# Allegro board AVRUSB500_1.brd
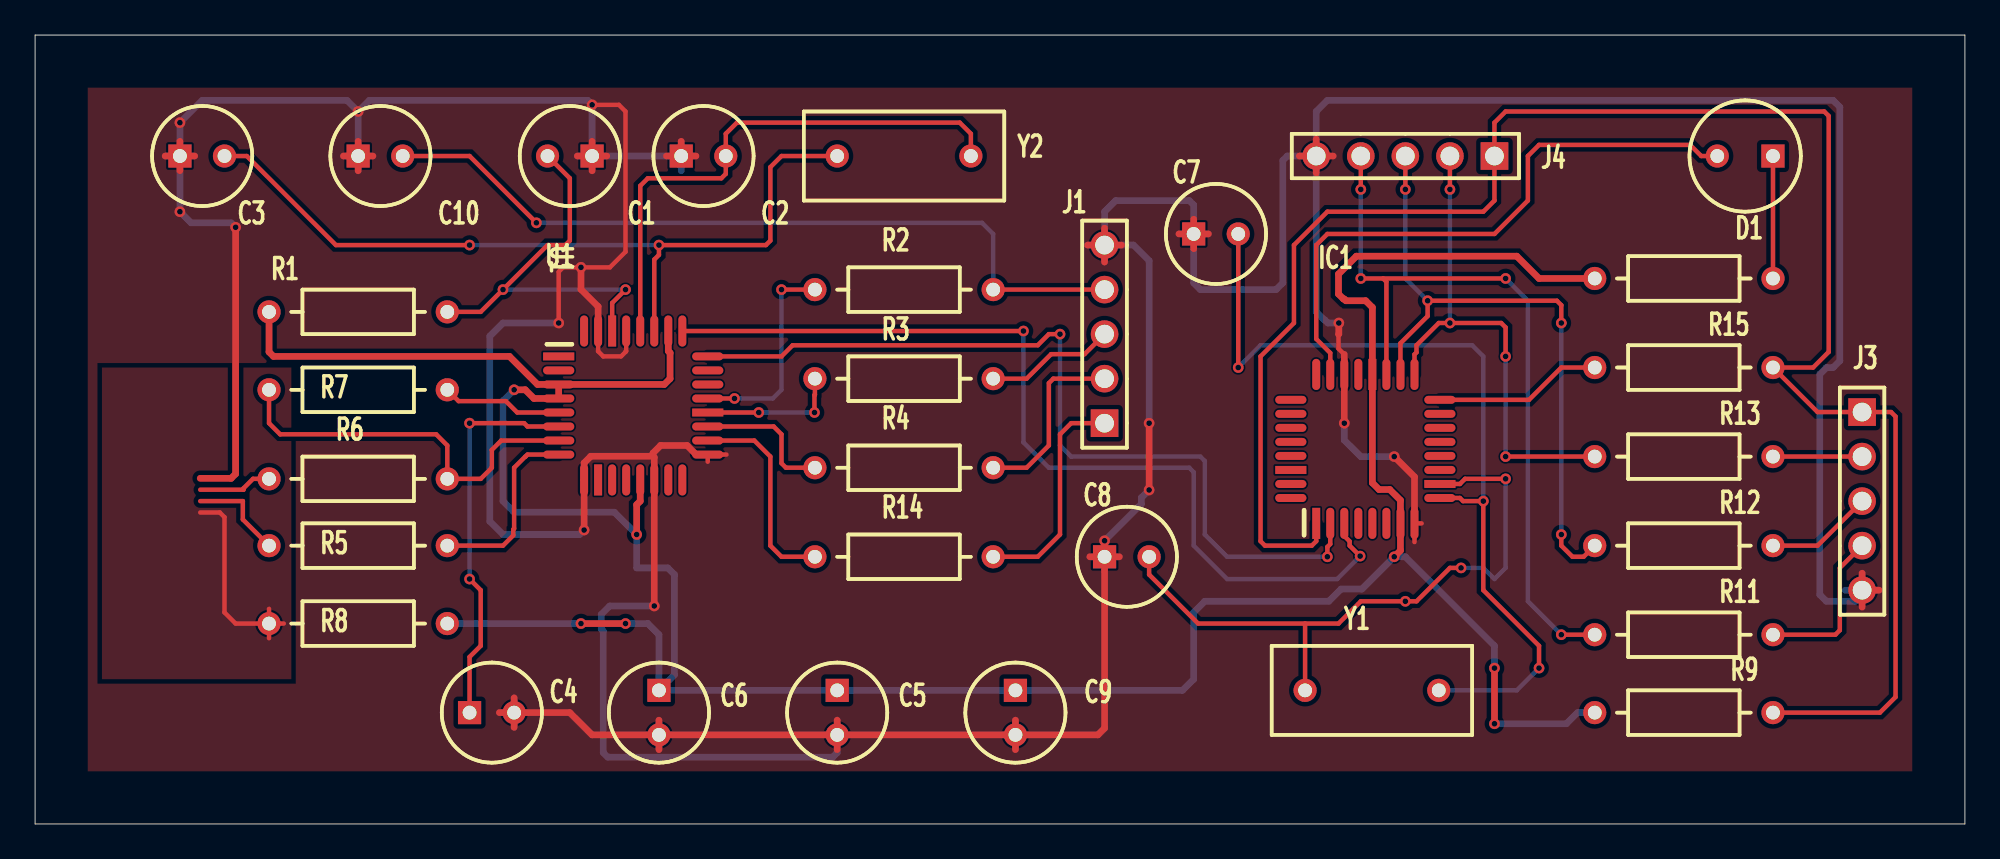
[diagram p0: board, top side]
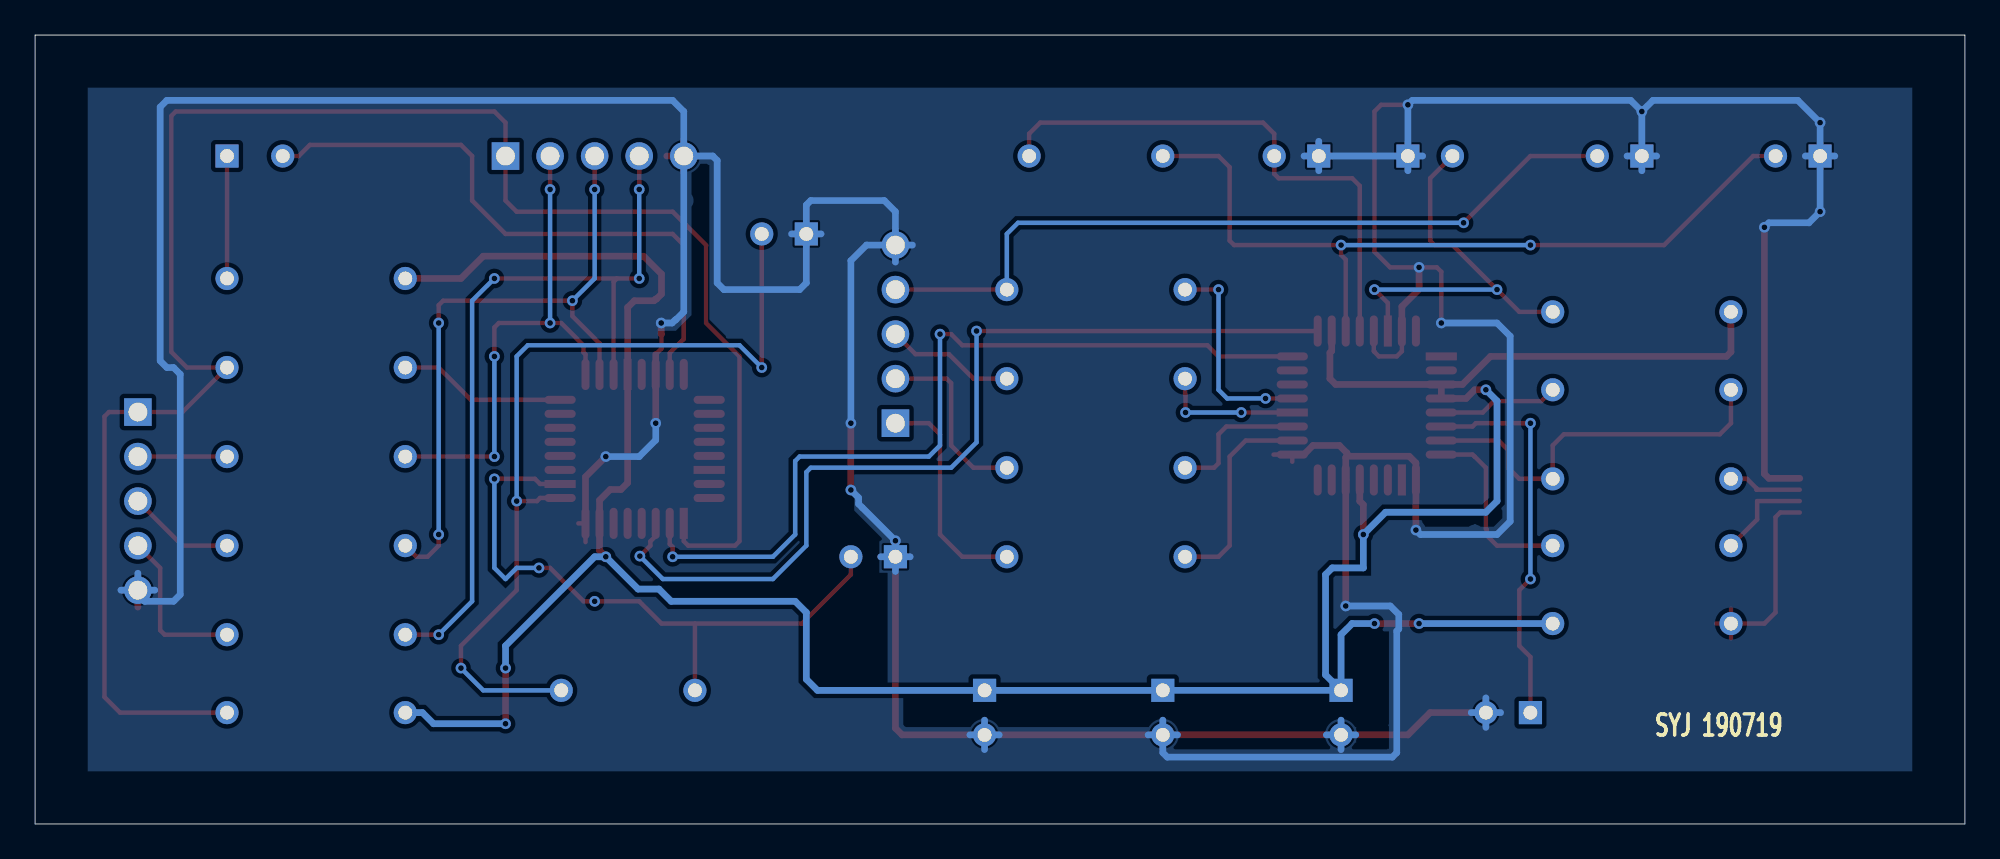
[diagram p1: board, bottom side, seen from below]

Outline 110 x 45 mm; copper layers: TOP, BOTTOM. Coordinates in mm from the lower left corner of the outline.
Outline path: 0,45 110,45 110,0 0,0 0,45

## Design rules (mm)
constraint set DEFAULT: min track width 0.254
net group POWERNETS: nets VCC

## Placement (name value [footprint] x y rotation side)
C1  47nF  [CPCYL1D225LS100031]  31.75 38.1 180 top
C2  27pF  [CPCYL1D225LS100031]  36.83 38.1 0 top
C3  27pF  [CPCYL1D225LS100031]  8.25 38.1 0 top
C4  47nF  [CPCYL1D225LS100031]  24.77 6.35 0 top
C5  100nF  [CPCYL1D225LS100031]  45.72 7.62 270 top
C6  1uF  [CPCYL1D225LS100031]  35.56 7.62 270 top
C7  100nF  [CPCYL1D225LS100031]  66.04 33.66 0 top
C8  100nF  [CPCYL1D225LS100031]  60.96 15.24 0 top
C9  100nF  [CPCYL1D225LS100031]  55.88 7.62 270 top
C10  22nF  [CPCYL1D225LS100031]  18.42 38.1 0 top
D1  LED  [CYLD250LS125031]  99.06 38.1 180 top
IC1  ATmega8  [QUAD80M32WG900]  73.03 17.15 0 top
J1  bbpg_Bitbang  [BLKCON100VHTM1SQSW1005]  60.96 22.86 90 top
J3  avrusb500_out  [BLKCON100VHTM1SQSW1005]  104.14 23.5 270 top
J4  firmware_in  [BLKCON100VHTM1SQSW1005]  83.19 38.1 180 top
NOREF  -  []  0 45 0 top
NOREF#2  -  []  0 0 90 top
R1  470  [AX400X100031]  23.5 29.21 180 top
R2  220  [AX400X100031]  44.45 30.48 0 top
R3  220  [AX400X100031]  44.45 25.4 0 top
R4  220  [AX400X100031]  44.45 20.32 0 top
R5  27  [AX400X100031]  13.34 15.88 0 top
R6  27  [AX400X100031]  13.34 19.69 0 top
R7  1.5k  [AX400X100031]  13.34 24.77 0 top
R8  2.2  [AX400X100031]  13.34 11.43 0 top
R9  10k  [AX400X100031]  88.9 6.35 0 top
R10  470  [AX400X100031]  99.06 31.12 180 top
R11  1k  [AX400X100031]  88.9 10.8 0 top
R12  220  [AX400X100031]  88.9 15.88 0 top
R13  1k  [AX400X100031]  88.9 20.96 0 top
R14  220  [AX400X100031]  44.45 15.24 0 top
R15  220  [AX400X100031]  88.9 26.04 0 top
U1  FT232BM  [QUAD80M32WG900]  29.85 26.67 270 top
Y1  3.6864Mhz  [RAD450X200LS300031]  72.39 7.62 0 top
Y2  6Mhz  [RAD450X200LS300031]  53.34 38.1 180 top

## Library data of the parts
C1-C5 C7-C10 = CAPACITOR NON-POL: alternate symbols: (SMDCAP)
C6 = CAPACITOR POL: alternate symbols: (SMDCAP)
D1 = LED
IC1 = ATmega8-DIL28_1
J1 J3 J4 = CON5
R1-R15 = R: alternate symbols: (SMDRES)
U1 = FT232BM_2
Y1 Y2 = ZTA

## Footprints (pads in the part's own frame, mm; a bottom-side part is the same pattern mirrored in y, then rotated)
AX400X100031
  round 1.321 hole 0.787: 1(0,0) 2(10.16,0)
BLKCON100VHTM1SQSW1005
  rect 1.575x1.575 hole 1.067: 1(0,0)
  round 1.575 hole 1.067: 2(2.54,0) 3(5.08,0) 4(7.62,0) 5(10.16,0)
CPCYL1D225LS100031
  rect 1.321x1.321 hole 0.787: 1(0,0)
  round 1.321 hole 0.787: 2(2.54,0)
CYLD250LS125031
  rect 1.321x1.321 hole 0.787: 1(0,0)
  round 1.321 hole 0.787: 2(3.175,0)
QUAD80M32WG900
  rect 0.457x1.778 smd: 1(0,0) 20(3.2,8.496)
  oval 0.457x1.778 smd: 2(0.8,0) 3(1.6,0) 4(2.4,0) 5(3.2,0) 6(4,0) 7(4.801,0) 8(5.601,0) 17(5.601,8.496) 18(4.801,8.496) 19(4,8.496) 21(2.4,8.496) 22(1.6,8.496) 23(0.8,8.496) 24(0,8.496)
  oval 1.778x0.457 smd: 9(7.048,1.448) 11(7.048,3.048) 12(7.048,3.848) 13(7.048,4.648) 14(7.048,5.448) 15(7.048,6.248) 16(7.048,7.048) 25(-1.448,7.048) 26(-1.448,6.248) 27(-1.448,5.448) 28(-1.448,4.648) 29(-1.448,3.848) 31(-1.448,2.248) 32(-1.448,1.448)
  rect 1.778x0.457 smd: 10(7.048,2.248) 30(-1.448,3.048)
RAD450X200LS300031
  round 1.321 hole 0.787: 1(0,0) 2(7.62,0)

## Nets
+5V: R8.1
GND: C1.1 C2.1 C3.1 C4.2 C5.2 C6.2 C7.1 C8.1 C9.2 C10.1 IC1.8 IC1.22 J1.5 J3.5 J4.5 U1.9 U1.14 U1.17 U1.29 U1.31
VCC: C5.1 C6.1 C9.1 IC1.7(VCC) IC1.20 R1.2 R8.2 R9.1 R10.2 U1.3 U1.4 U1.13 U1.26
BMISO: J1.3 R3.2
BMOSI: J1.2 R4.2
BRESET: J1.1 R14.2
BSCK: C10.2 J1.4 R2.2
D+: R6.1
D-: R5.1
F_MISO: IC1.18 J4.3 R12.1
F_MOSI: IC1.17 J4.2 R13.1
F_SCK: IC1.19 J4.4 R11.1
MISO: J3.3 R12.2
MOSI: J3.2 R13.2
RESET: IC1.1 J3.1 J4.1 R9.2 R15.2
RXD: IC1.2 U1.24
SCK: J3.4 R11.2
TXD: IC1.3 U1.25
N02483: R6.2 R7.1 U1.7
N02615: R5.2 U1.8
N03527: C4.1 U1.6
N06839: R2.1 U1.21
N06967: R3.1 U1.20
N07033: R4.1 U1.19
N07247: R14.1 U1.18
N11951: R7.2 U1.5
N15182: C7.2 IC1.9 Y1.2
N15289: C8.2 IC1.10 Y1.1
N19734: D1.2(CATHODE) IC1.23
N20572: D1.1 R10.1
N22544: IC1.16 R15.1
N41098: C3.2 U1.27 Y2.2
N41106: C2.2 U1.28(XTOUT) Y2.1
N49165: C1.2 R1.1 U1.30

Pads without a net: IC1 4 5 6 11 12 13 14 15 21 24 25 26 27 28 29 30 31 32; U1 1 2 10 11 12 15 16 22 23 32

## Via types
v1: diameter 0.61, hole 0.33, TOP to BOTTOM, 55 vias

## Routing (per net, layer and track width the routed paths; a pad name or vN(x,y) marks a point on that pad's centre or on a via; arc(x,y) is an arc through that point)
+5V: length 12.2
  TOP w0.254: 9.42,17.77 10.53,17.77 10.8,17.5 10.8,12.07 11.43,11.43 R8.1 ; R8.1 13.34,12.27 ; R8.1 14.17,11.43 ; R8.1 13.34,10.59
GND: length 401.7
  TOP w0.254: v1(31.75,41.02) 33.27,41.02 33.66,40.64 33.66,32.64 32.77,31.75 v1(31.12,31.75) 30.1,31.75 29.85,31.5 v1(29.85,28.58) ; 79.03,17.15 IC1.8 78.63,16.08 ; 39.41,21.07 U1.17 38.34,20.66 ; 74.3,27.94 74.3,27.11 74.62,26.78 ; U1.31 32.09,26.96 32.38,26.67 33.4,26.67 33.66,26.92 33.66,26.94 33.69,26.98 U1.29
  TOP w0.381: 74.3,27.94 74.31,27.95 v1(74.31,28.58) ; C5.2 C9.2 ; C5.2 45.72,4.24 ; C5.2 45.72,5.92 ; C5.2 C6.2 ; C9.2 55.88,5.92 ; C9.2 60.58,5.08 60.96,5.46 C8.1 ; C9.2 55.88,4.24 ; 35.56,4.24 C6.2 ; C6.2 35.56,5.92 ; C6.2 31.75,5.08 30.48,6.35 27.31,6.35 ; 59.99,33.02 J1.5 ; J1.5 60.96,33.99 ; J1.5 61.93,33.02 ; J1.5 60.96,32.05 ; C1.1 31.75,38.94 ; C1.1 32.59,38.1 ; C1.1 30.91,38.1 ; C1.1 31.75,37.26 ; 27.31,6.35 26.47,6.35 ; 27.31,6.35 27.31,7.19 ; 27.31,6.35 27.31,5.51 ; C2.1 37.67,38.1 ; C2.1 35.99,38.1 ; C2.1 36.83,38.94 ; C3.1 8.25,38.94 ; C3.1 7.42,38.1 ; C3.1 9.09,38.1 ; C3.1 8.25,37.26 ; 66.04,32.82 C7.1 ; C7.1 65.2,33.66 ; C7.1 66.04,34.49 ; C7.1 66.88,33.66 ; 60.12,15.24 C8.1 ; C8.1 60.96,16.08 ; C8.1 61.8,15.24 ; C10.1 19.25,38.1 ; C10.1 18.42,38.94 ; C10.1 17.58,38.1 ; C10.1 18.42,37.26 ; 73.03,37.13 J4.5 ; J4.5 73.99,38.1 ; J4.5 73.03,39.07 ; J4.5 72.06,38.1 ; v1(63.5,22.86) v1(63.5,19.05) ; J3.5 104.14,14.3 ; J3.5 105.11,13.34 ; J3.5 104.14,12.37
  TOP w0.382: U1.17 37.68,21.07 37.16,21.59 35.65,21.59 35.22,21.16 35.22,20.97 ; U1.31 32.09,29.51 31.12,30.49 v1(31.12,31.75) ; v1(11.43,34.04) 11.43,19.97 11.18,19.72 9.42,19.72 ; v1(77.47,20.96) 78.63,19.8 IC1.8 ; v1(35.29,12.43) U1.14 35.29,20.9 35.22,20.97 ; 35.22,20.97 31.68,20.97 31.29,20.59 U1.9 v1(31.29,16.76) ; 74.62,26.78 v1(74.62,22.86)
  BOTTOM w0.381: 66.88,33.66 C7.1 65.2,33.66 ; 36.83,37.26 C2.1 ; C2.1 36.83,38.94 ; C2.1 37.67,38.1 ; 44.88,5.08 C5.2 ; C5.2 46.56,5.08 ; C5.2 45.72,5.92 ; 9.09,38.1 C3.1 7.42,38.1 ; 60.12,15.24 C8.1 ; C8.1 61.8,15.24 ; C8.1 60.96,14.4 ; 103.17,13.34 J3.5 ; J3.5 104.14,14.3 ; J3.5 104.14,13.08 103.76,12.7 102.11,12.7 101.73,13.08 101.73,25.65 102.11,26.04 102.49,26.04 102.87,26.42 102.87,40.89 102.49,41.28 73.66,41.28 73.03,40.64 J4.5 ; J3.5 105.11,13.34 ; 62.87,18.06 63.06,18.25 63.06,18.61 v1(63.5,19.05) ; 27.31,6.35 28.14,6.35 ; 27.31,6.35 26.47,6.35 ; 27.31,6.35 27.31,5.51 ; 27.31,6.35 27.31,7.19 ; C10.1 19.25,38.1 ; C10.1 18.42,37.26 ; C10.1 17.58,38.1 ; 55.04,5.08 C9.2 ; C9.2 56.72,5.08 ; C9.2 55.88,5.92 ; C9.2 55.88,4.24 ; C6.2 35.56,5.92 ; C6.2 36.4,5.08 ; C6.2 34.72,5.08 ; C6.2 35.56,4.24 ; 31.75,37.26 C1.1 30.91,38.1 ; 60.96,32.05 J1.5 59.99,33.02
  BOTTOM w0.382: C5.2 45.72,4.06 45.47,3.81 32.64,3.81 32.38,4.06 32.38,11 32.27,11.12 32.27,11.95 32.75,12.43 v1(35.29,12.43) ; v1(18.42,40.64) 17.78,41.28 9.53,41.28 v1(8.25,40.01) C3.1 v1(8.25,34.93) 8.89,34.29 11.18,34.29 v1(11.43,34.04) ; v1(18.42,40.64) 19.05,41.28 31.5,41.28 v1(31.75,41.02) C1.1 C2.1 ; v1(18.42,40.64) C10.1 ; v1(63.5,22.86) 63.5,32.13 62.61,33.02 J1.5 60.96,34.93 61.6,35.56 65.79,35.56 66.04,35.31 C7.1 66.04,30.86 66.42,30.48 70.74,30.48 71.12,30.86 71.12,37.85 71.37,38.1 J4.5 73.03,29.21 73.48,28.75 73.51,28.75 73.69,28.58 v1(74.31,28.58) ; C8.1 v1(60.96,16.15) 62.87,18.06 ; v1(74.62,22.86) 74.62,21.9 75.56,20.96 v1(77.47,20.96) ; v1(31.29,16.76) 31.04,16.51 26.67,16.51 25.92,17.26 25.92,27.83 26.67,28.58 v1(29.85,28.58)
VCC: length 177.1
  TOP w0.381: v1(31.12,11.43) v1(33.66,11.43) ; v1(83.19,8.89) v1(83.19,5.72)
  TOP w0.382: 34.49,19.62 34.49,18.42 34.29,18.21 v1(34.29,16.51) ; U1.3 28.64,25.07 27.04,26.67 13.59,26.67 13.34,26.92 13.34,29.21 ; U1.3 35.87,25.07 36.19,25.4 36.19,26.87 36.09,26.98 U1.26 ; U1.3 U1.4 28.44,24.27 27.94,24.77 v1(27.31,24.77) ; R10.2 85.73,31.12 84.46,32.39 75.31,32.39 74.3,31.37 74.3,30.23 74.58,29.94 74.62,29.94 74.72,29.84 75.84,29.84 76.23,29.46 IC1.20 76.23,19.46 76.61,19.08 77.22,19.08 77.83,18.47 IC1.7 77.83,15.6 v1(77.47,15.24)
  BOTTOM w0.381: C5.1 C6.1 ; 34.93,11.43 34.93,11.43 v1(33.66,11.43)
  BOTTOM w0.382: 34.93,11.43 35.56,10.8 C6.1 36.45,8.51 36.45,14.22 36.06,14.61 34.29,14.61 v1(34.29,16.51) 33.02,17.78 27.31,17.78 26.67,18.42 26.67,24.13 v1(27.31,24.77) ; v1(83.19,8.89) 83.19,10.16 78.11,15.24 v1(77.47,15.24) 75.63,13.4 74.44,13.4 73.74,12.7 66.68,12.7 66.04,12.06 66.04,8.26 65.41,7.62 C9.1 C5.1 ; v1(31.12,11.43) R8.2 ; v1(83.19,5.72) 87.29,5.72 87.92,6.35 R9.1
BMISO: length 7.4
  TOP w0.254: R3.2 56.52,25.4 57.91,26.8 59.82,26.8 J1.3
BMOSI: length 10.5
  TOP w0.254: R4.2 56.52,20.32 57.79,21.59 57.79,25.15 58.04,25.4 J1.2
BRESET: length 12.9
  TOP w0.254: J1.1 59.06,22.86 58.42,22.23 58.42,16.51 57.15,15.24 R14.2
BSCK: length 45
  TOP w0.254: R2.2 J1.4 ; v1(28.58,34.29) 24.77,38.1 C10.2
  BOTTOM w0.254: v1(28.58,34.29) 53.98,34.29 54.61,33.66 R2.2
D+: length 4.2
  TOP w0.254: 9.42,19.07 11.88,19.07 11.88,19.14 12.42,19.69 R6.1
D-: length 5.6
  TOP w0.254: 9.42,18.42 11.84,18.42 11.84,17.37 R5.1
F_MISO: length 37.5
  TOP w0.254: IC1.18 77.83,27.42 79.38,28.97 v1(79.38,29.84) 86.74,29.84 87,29.59 v1(87,28.58) ; J4.3 v1(78.11,36.2) ; v1(87,16.51) 87,15.88 87.63,15.24 88.27,15.24 R12.1
  BOTTOM w0.254: v1(78.11,36.2) 78.11,31.12 v1(79.38,29.84) ; v1(87,28.58) v1(87,16.51)
F_MOSI: length 29.4
  TOP w0.254: v1(83.82,20.96) R13.1 ; IC1.17 78.63,26.78 78.74,26.9 78.74,27.31 80.01,28.58 v1(80.65,28.58) 83.57,28.58 83.82,28.32 v1(83.82,26.67) ; J4.2 v1(80.65,36.2)
  BOTTOM w0.254: v1(80.65,36.2) v1(80.65,28.58) ; v1(83.82,26.67) v1(83.82,20.96)
F_SCK: length 44.3
  TOP w0.254: v1(83.82,31.12) 76.84,31.12 ; 76.84,31.12 77.03,30.93 IC1.19 ; 76.84,31.12 v1(75.56,31.12) ; J4.4 v1(75.56,36.2) ; v1(87,10.8) R11.1
  BOTTOM w0.254: v1(75.56,31.12) v1(75.56,36.2) ; v1(87,10.8) 85.09,12.7 85.09,29.84 v1(83.82,31.12)
MISO: length 6.1
  TOP w0.254: 104.14,18.42 101.6,15.88 R12.2
MOSI: length 5.1
  TOP w0.254: R13.2 J3.2
RESET: length 106.9
  TOP w0.254: R9.2 105.16,6.35 106.05,7.24 106.05,23.24 105.79,23.5 J3.1 101.6,23.5 R15.2 101.35,26.04 102.24,26.92 102.24,40.39 101.98,40.64 83.82,40.64 83.19,40.01 J4.1 83.19,35.56 82.55,34.93 73.66,34.93 71.75,33.02 71.75,28.58 69.85,26.67 69.85,16.13 70.1,15.88 72.77,15.88 73.03,16.13 IC1.1
RXD: length 49.3
  TOP w0.254: IC1.2 73.83,15.96 73.66,15.8 v1(73.66,15.24) ; v1(58.42,27.94) 57.79,27.94 57.15,27.31 43.18,27.31 42.55,26.67 U1.24
  BOTTOM w0.254: v1(73.66,15.24) 67.94,15.24 66.68,16.51 66.68,20.7 66.42,20.96 59.06,20.96 58.42,21.59 v1(58.42,27.94)
SCK: length 9.3
  TOP w0.254: J3.4 102.87,14.61 102.87,11.05 102.62,10.8 R11.2
TXD: length 53.5
  TOP w0.254: U1.25 v1(56.34,28.12) ; v1(75.53,15.28) 74.93,15.88 74.93,16.12 74.62,16.42 74.62,17.15
  BOTTOM w0.254: v1(56.34,28.12) 56.34,21.77 57.79,20.32 65.79,20.32 66.04,20.07 66.04,15.88 67.94,13.97 74.22,13.97 v1(75.53,15.28)
N02483: length 22.3
  TOP w0.254: 29.85,21.87 26.57,21.87 26.04,21.34 26.04,20.32 25.4,19.69 R6.2 23.5,21.59 22.86,22.23 13.97,22.23 13.34,22.86 R7.1
N02615: length 10.7
  TOP w0.254: U1.8 28.07,21.07 27.95,20.96 27.94,20.96 27.31,20.32 27.31,16.85 27.25,16.79 27.25,16.46 26.67,15.88 R5.2
N03527: length 22.2
  TOP w0.254: v1(24.77,13.97) 25.4,13.34 25.4,10.16 24.77,9.53 C4.1 ; v1(24.77,22.86) 27.88,22.86 28.07,22.67 U1.6
  BOTTOM w0.254: v1(24.77,13.97) v1(24.77,22.86)
N06839: length 12
  TOP w0.254: U1.21 v1(39.87,24.27) ; v1(42.55,30.48) R2.1
  BOTTOM w0.254: v1(42.55,30.48) 42.55,24.77 42.05,24.27 v1(39.87,24.27)
N06967: length 8
  TOP w0.254: U1.20 v1(41.25,23.47) ; R3.1 44.45,24.49 44.43,24.46 v1(44.43,23.47)
  BOTTOM w0.254: v1(41.25,23.47) v1(44.43,23.47)
N07033: length 8
  TOP w0.254: R4.1 42.8,20.32 42.55,20.57 42.55,22.23 42.1,22.67 U1.19
N07247: length 11.8
  TOP w0.254: R14.1 42.55,15.24 41.91,15.88 41.91,20.96 41,21.87 38.34,21.87
N11951: length 6.9
  TOP w0.254: U1.5 27.48,23.47 26.83,24.12 24.14,24.12 R7.2
N15182: length 50.3
  TOP w0.254: C7.2 v1(68.58,26.04) ; v1(85.73,8.89) 85.73,10.16 82.55,13.34 v1(82.55,18.42) 81.39,18.42 81.22,18.59 IC1.9
  BOTTOM w0.254: v1(82.55,18.42) 82.55,26.67 81.92,27.31 69.85,27.31 v1(68.58,26.04) ; Y1.2 84.46,7.62 v1(85.73,8.89)
N15289: length 37.1
  TOP w0.254: IC1.10 81.22,19.39 81.51,19.69 v1(83.82,19.69) ; 72.39,11.43 Y1.1 ; 72.39,11.43 74.3,11.43 75.56,12.7 v1(78.11,12.7) 78.74,12.7 80.65,14.61 v1(81.28,14.61) ; 72.39,11.43 66.29,11.43 63.5,14.22 C8.2
  BOTTOM w0.254: v1(81.28,14.61) 82.55,14.61 83.19,13.97 83.82,14.61 v1(83.82,19.69)
N19734: length 34.7
  TOP w0.254: IC1.23 73.83,26.87 73.03,27.67 73.03,33.02 73.66,33.66 83.19,33.66 85.09,35.56 85.09,38.1 85.73,38.74 94.34,38.74 94.97,38.1 D1.2
N20572: length 7
  TOP w0.254: D1.1 R10.1
N22544: length 9.6
  TOP w0.254: IC1.16 85.15,24.19 87,26.04 R15.1
N41098: length 46.6
  TOP w0.254: U1.27 35.29,32.19 35.56,32.46 v1(35.56,33.02) 41.66,33.02 41.91,33.27 41.91,37.47 42.55,38.1 Y2.2 ; C3.2 12.06,38.1 17.15,33.02 v1(24.77,33.02)
  BOTTOM w0.254: v1(24.77,33.02) v1(35.56,33.02)
N41106: length 31.5
  TOP w0.254: Y2.1 53.34,39.37 52.71,40.01 40,40.01 39.37,39.37 C2.2 39.37,37.08 39.12,36.83 34.93,36.83 34.49,36.4 34.49,28.12
N49165: length 23.7
  TOP w0.254: U1.30 32.89,29.72 v1(33.66,30.48) ; C1.2 30.48,36.83 30.48,33.27 30.23,33.02 29.21,33.02 v1(26.67,30.48) 25.4,29.21 R1.1
  BOTTOM w0.254: v1(26.67,30.48) v1(33.66,30.48)

## Copper pours and planes (outline as drawn; the poured copper is in the pictures)
+5V on TOP: 3.81,26.04 3.81,8.26 14.61,8.26 14.61,26.04
GND on TOP: 3,3 3,42 107,42 107,3 ; 3 cut-outs
GND on BOTTOM: 3,3 3,42 107,42 107,3 ; 4 cut-outs

## Text on the board
Ref Des/Silkscreen Bottom: SYJ 190719
NCLEGEND-1-2: FIGURE | SIZE | 0.33 | 0.7869 | 1.0671 | 1.4x0.5001 | DRILL CHART: TOP to BOTTOM | ALL UNITS ARE IN MILLIMETERS | PLATED | QTY | 55 | 56 | 15 | 4
